# Altium PCB Tag102 Rev21bak080113.PcbDoc
Units mil, origin at the board's own origin, x right, y up, seen from the top; angles counter-clockwise.
Board outline 1902 x 989 mil, 2 copper layers (TopLayer, BottomLayer), stack 64.611 mil thick; 74 components, 42 nets, 215 pads, 84 vias.
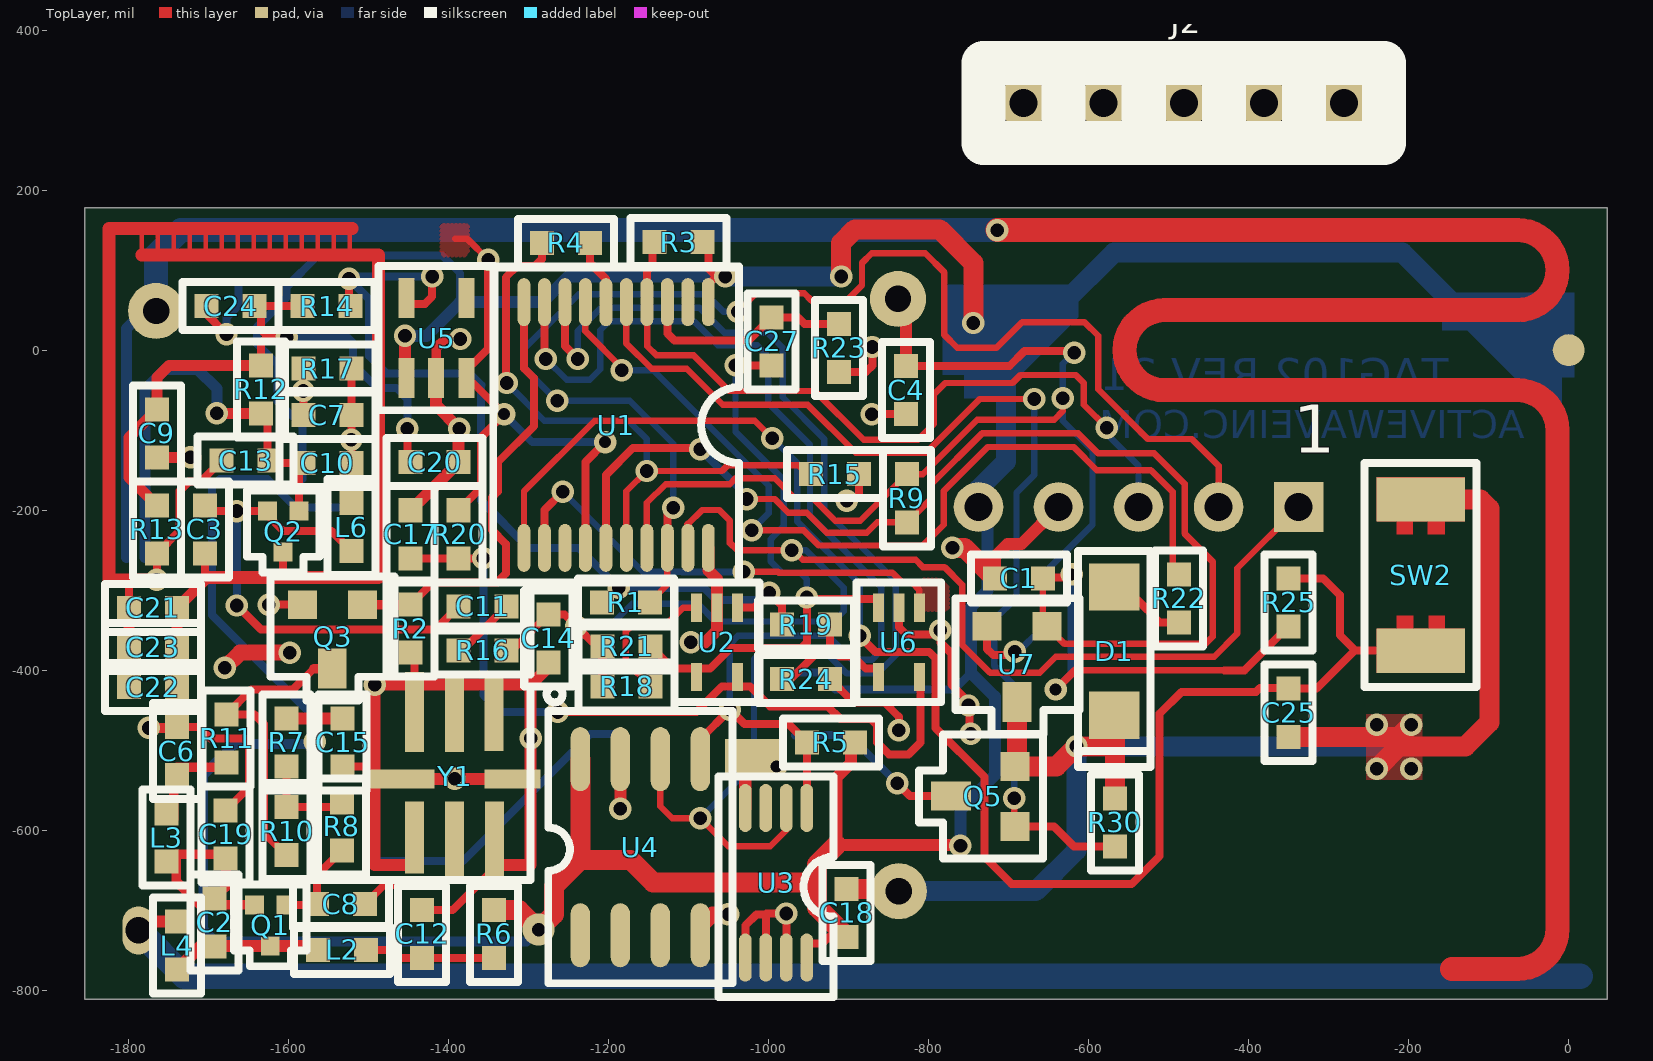
[diagram p0: TopLayer view]
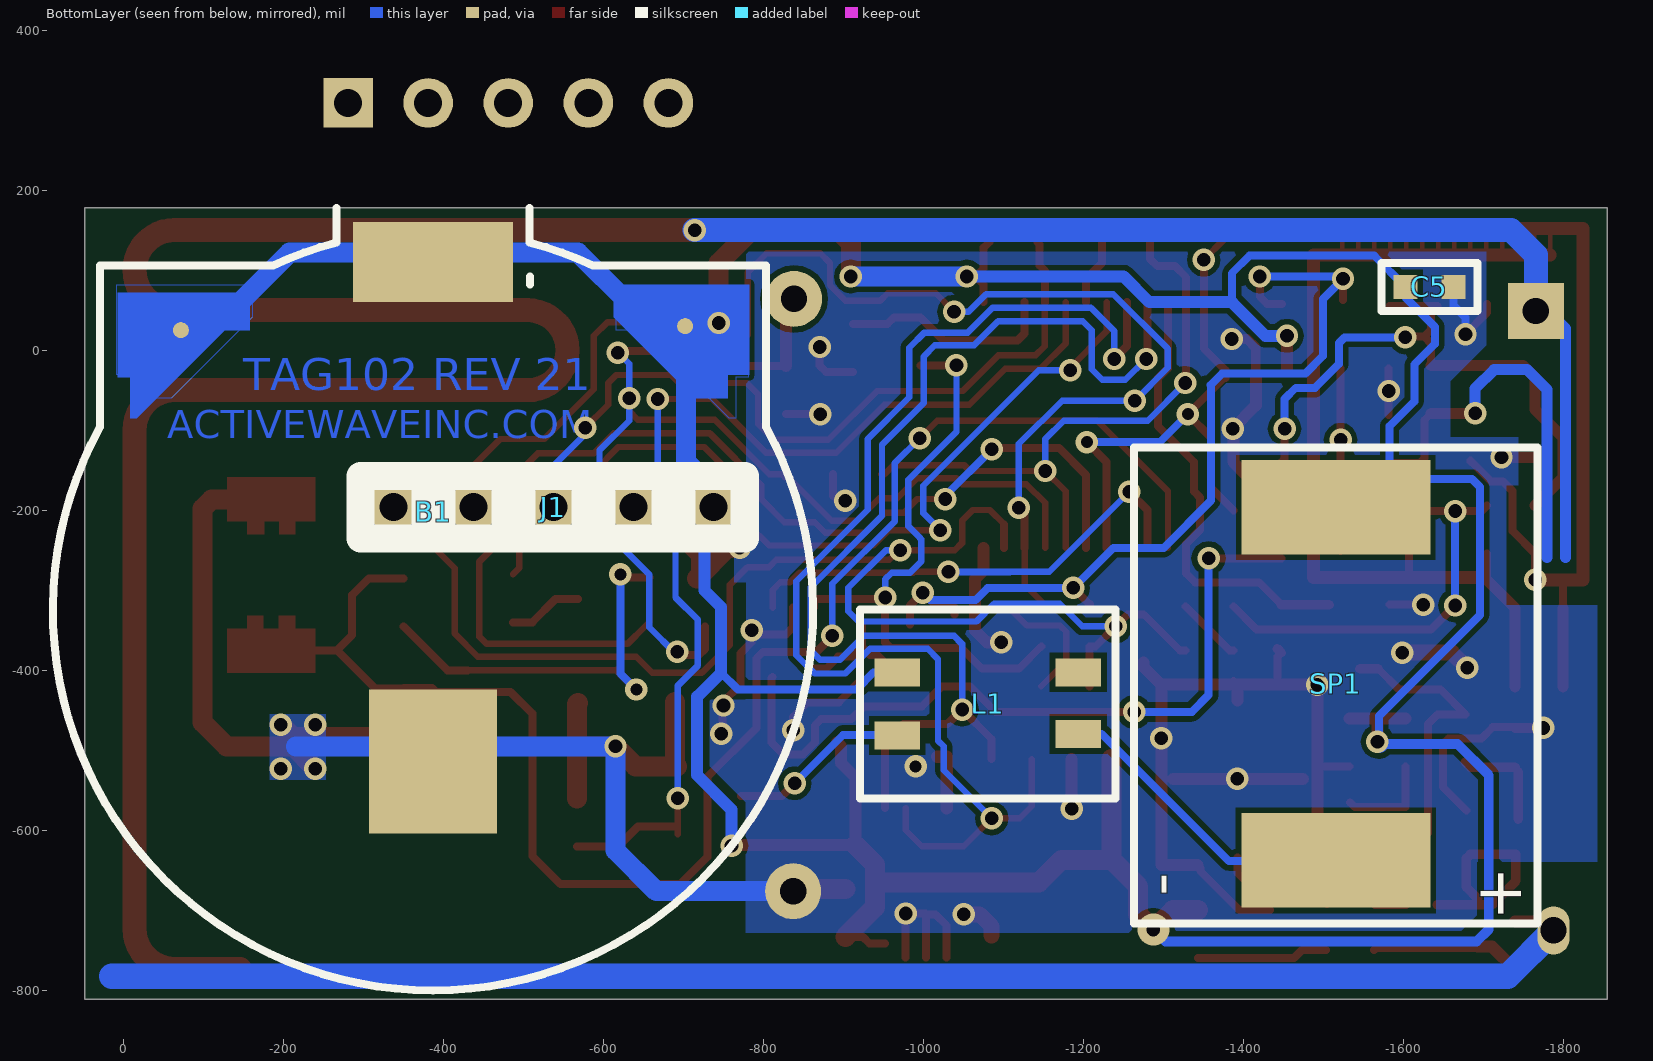
[diagram p1: BottomLayer view, seen from below]

## Layer stack, top to bottom
TopLayer: signal copper 1.4
Dielectric: core 61.811, FR-4, Dk 4.8
BottomLayer: signal copper 1.4

## Board outline
-1854,178 48,178 48,-811 -1854,-811

## Design rules (kind name [scope] priority, off if disabled: settings)
Clearance Clearance_1 [All] p1: gap=7
ComponentClearance [All] p1 off: gap=10 collisioncheckmode=3 verticalgap=10 showdistances=FALSE
HoleSize [All] p1 off: absolutevalues=TRUE maxlimit=100 minlimit=1 maxpercent=80.000 minpercent=20.000
PolygonConnect [All] p1: connectstyle=Direct reliefconductorwidth=20 reliefentries=4 polygonreliefangle="90 Angle"
RoutingVias [All] p1: holewidth=15 width=28 viastyle="Through Hole" minholewidth=15 minwidth=28 maxholewidth=20 maxwidth=40
ShortCircuit ShortCircuit_1 [InNet('NetC13_2') vs InNet('NetC3_1')] p1: allowed=TRUE
ShortCircuit [All] p2: allowed=FALSE
SilkscreenOverComponentPads [All] p1: minsilkscreentomaskgap=10
SolderMaskExpansion [All] p1: expansion=4
TestPointUsage [All] p1: valid=0 allowmultiple=FALSE
Testpoint [All] p1: side=15 testpointundercomponent=TRUE minsize=40 maxsize=100 preferedsize=60 minholesize=20 maxholesize=40 preferedholesize=32 testpointgrid=1 style=1023 order=0-112345678
Width [All] p1: maxlimit=100 minlimit=6 preferedwidth=10
20 further rules are at their usual default settings.

## Components (designator, comment, footprint, x,y, rotation, side; value= is the part's Value field where it differs from the comment)
B1 "BATT HOLDER COIN CR2032 CUT" "BATT HOLDER COIN CR2032 CUT_020812" -387,-325 r180 bottom
C1 "0.1 uF" 0603 -657,-285 r180 top
C2 "2 PF" 0603 -1692,-745 r90 top
C3 "2 pF" 0603 -1704,-254 r90 top
C4 "10pF" 0603 -828,-20 r270 top
C5 ".1uF" 0603 -1602,79 r180 bottom
C6 "100 pF" 0603 -1739,-471 r270 top
C7 "100 pF" 0603 -1521,-81 r180 top
C8 "1000 pF" 0603 -1564,-692 r0 top
C9 "1000 pF" 0603 -1764,-74 r270 top
C10 "1000 pF" 0603 -1581,-141 r0 top
C11 ".1uF" 0603 -1387,-320 r0 top
C12 "33 pF" 0603 -1432.59,-759.41 r90 top
C13 "33 pF" 0603 -1623,-138 r180 top
C14 "100pF" 0603 -1275,-390 r90 top
C15 "0.1 uF" 0603 -1532,-460 r270 top
C17 ".01uF" 0603 -1447,-200 r270 top
C18 "0.1 uF" 0603 -902.13,-733 r90 top
C19 "2.7 pF" 0603 -1678,-635 r90 top
C20 "15pF" 0603 -1387,-140 r180 top
C21 "1.5pF" 0603 -1799,-322 r0 top
C22 "DNS" 0603 -1799,-421 r0 top
C23 "DNS" 0603 -1799,-371 r0 top
C24 "0.1 uF" 0603 -1702,55 r0 top
C25 "22pF" 0603 -350,-423 r270 top
C27 "15pF" 0603 -996,41 r270 top
D1 "LED" "LED STANLEY H_1105W" -568,-376 r90 top
J1 "1X5 HEADER" "1X5 HEADER" -537.5,-196 r180 bottom
J2 "4pin Connector" "1X5 HEADER" -481,309 r180 top (schematic designator J1)
L1 "TRANSFORMER" COIL_6MMX6MM_011012 -1080,-442 r180 bottom
L2 "10nH" 0603 -1502.59,-749.41 r180 top
L3 "0.18uH" 0603 -1752,-579.06 r270 top
L4 "10nH" 0603 -1739,-714 r270 top
L6 "0.33uH" 0603 -1521,-251 r90 top
Q1 "NE85619" "3 PIN ULTRA SUPER MINI MOLD" -1642,-693 r270 top
Q2 "NE85619" "3 PIN ULTRA SUPER MINI MOLD" -1626,-201 r270 top
Q3 "2N7002" "SOT23 FET" -1507,-318 r180 top
Q5 "FDN327N" "SOT23 FET" -692,-595 r90 top
R1 "4.7K" 0603 -1148,-315 r180 top
R2 "1 M" 0603 -1447,-378 r90 top
R3 "39k" 0603 -1142,135 r0 top
R4 "39k" 0603 -1283,134 r0 top
R5 "39k" 0603 -952,-490 r0 top
R6 "22" 0603 -1342.59,-759.41 r90 top
R7 "6.8K" 0603 -1602,-460 r270 top
R8 "4.7 K" 0603 -1533,-625 r90 top
R9 "39K" 0603 -827,-215 r90 top
R10 "39K" 0603 -1602,-571 r270 top
R11 "68" 0603 -1677,-515 r90 top
R12 "10" 0603 -1634,-79 r90 top
R13 "10" 0603 -1764,-194 r270 top
R14 "470" 0603 -1582,55 r0 top
R15 "39K" 0603 -887,-155 r180 top
R16 "3.0K" 0603 -1387,-375 r0 top
R17 "2K" 0603 -1521,-23 r180 top
R18 "1K" 0603 -1207,-420 r0 top
R19 "100K" 0603 -923,-343 r180 top
R20 "2.7K" 0603 -1387,-200 r270 top
R21 "220K" 0603 -1207,-370 r0 top
R22 "200" 0603 -487,-340 r90 top
R23 "300K" 0603 -912,33 r270 top
R24 "100K" 0603 -983,-411 r0 top
R25 "1M" 0603 -350,-345 r90 top
R30 "1M" 0603 -567,-620 r90 top
SP1 "4000 Hz" "SPEAKER 12MMX12MM_011012" -1515,-417 r270 bottom
SW2 "TILT SWITCH" SQ-SEN-DUAL1 -185,-281 r90 top
U1 "PIC16F690" "SSOP20 WIDE" -1075,60 r180 top locked
U2 "MIC861" SC70 -1064,-365 r180 top
U3 "DS1631" "SO8 SMALL" -952,-572 r180 top locked
U4 "24aa256" SO8 -1235,-731 r90 top
U5 "TC1070" SOT23-5A -1452,-35 r90 top
U6 "MAX9119EXK+" SC70 -837,-365 r180 top
U7 "TLE4913" SOT23W -652,-345 r180 top
Y1 "916.5_Resonator" RESONATOR -1392,-536 r0 top

## Footprints (in the part's own frame and the unit in brackets; to place one, negate y for a bottom-side part, rotate by r counter-clockwise, add the part's x,y. Pads: shape width x height; smd on the part's side, far side on the other; paste and mask are expansions set on the pad)
"1X5 HEADER" [mil]
  rect 62x62 hole 35: 1(-200,0)
  round 62 hole 35: 2(-100,0) 3(0,0) 4(100,0) 5(200,0)
  silkscreen extent -241,-39 239,39
"3 PIN ULTRA SUPER MINI MOLD" [mm]
  rect 0.6x0.6 smd: B(0,1) C(1.3,0.5) E(0,0)
  silkscreen extent -0.65,-0.65 1.95,1.65
0603 [mil]
  rect 30x30 smd: 1(0,0) 2(60,0)
  silkscreen extent -30,-30 90,30
"BATT HOLDER COIN CR2032 CUT_020812" [mil]
  rect 160x180 smd: 1(0,-188.88)
  round 20 smd: 2(-315,350) 2(315,355)
  rect 200x100 smd: 2(0,435)
  TopLayer region: 395,407 395,294 368,294 368,265 327,265 226,366 226,407
  TopLayer region: -394,397 -229,397 -229,350 -260,350 -370,240 -378,240 -378,291 -394,291
  silkscreen extent -475,-475 475,502
COIL_6MMX6MM_011012 [mil] "SMT"
  rect 57x35 smd: 1(-113,39.5) 2(-113,-39.5) 3(113,-37.5) 4(113,39.5)
  silkscreen extent -159,-118 159,118
"LED STANLEY H_1105W" [mm]
  rect 1.5x1.6 smd: A(2.032,0) K(-2.032,0)
  silkscreen extent -3.68,-1.15 3.17,1.16
RESONATOR [mm]
  rect 0.6x2.54 smd: 1(1.245,2.159) 2(0,2.134) 3(-1.27,2.134) 6(0,-1.983) 7(1.27,-1.983)
  rect 2.286x0.6 smd: 4(-1.776,0.008)
  rect 0.6x2.286 smd: 5(-1.27,-1.856)
  rect 1.778x0.6 smd: 8(1.831,0.008)
  silkscreen extent 2.92,2.44 3.43,2.95
SC70 [mm]
  rect 0.35x0.9 smd mask+0.051: 1(-0.65,-1.1) 2(0,-1.1) 3(0.65,-1.1) 4(0.65,1.1) 5(-0.65,1.1)
  silkscreen extent -1.35,-1.89 1.35,1.89
SO8 [mil]
  oval 80x24 smd: 1(0,0) 2(0,-50) 3(0,-100) 4(0,-150) 5(220,-150) 6(220,-100) 7(220,-50) 8(220,0)
  silkscreen extent -60,-190 280,40
"SO8 SMALL" [mil]
  oval 16x60 smd mask+2: 1(0,0) 2(25.59,0) 3(51.18,0) 4(76.77,0) 5(76.77,186.85) 6(51.18,186.85) 7(25.59,186.85) 8(0,186.85)
  silkscreen extent -33,-39 110,236
"SOT23 FET" [mil]
  rect 36x50 smd: D(38,80)
  rect 36x36 smd: G(0,0) S(75,0)
  silkscreen extent -40,-35 115,120
SOT23-5A [mil]
  rect 50x20 smd: 1(0,0) 2(0,-37) 3(0,-75) 4(100,-75) 5(100,0)
  silkscreen extent -40,-110 140,35
SOT23W [mil]
  rect 36x36 smd: 1(0,0) 2(74.8,0)
  rect 36x50 smd: 3(37.4,94.49)
  silkscreen extent -41,-35 114,134
"SPEAKER 12MMX12MM_011012" [mm] "SMT"
  rect 3x6 smd: 1(-5.6,0) 2(5.6,0)
  silkscreen extent -7.5,-6.4 7.6,6.4
SQ-SEN-DUAL1 [mm]
  rect 1.4x2.8 smd: 1(-2.4,0) 2(2.4,0)
  TopLayer region: 1.702,1.397 1.702,0.762 1.295,0.762 1.295,0.254 1.702,0.254 1.702,-0.229 1.295,-0.229 1.295,-0.762 1.702,-0.762 1.702,-1.397 3.099,-1.397 3.099,1.397
  TopLayer region: -1.702,-1.397 -1.702,-0.762 -1.295,-0.762 -1.295,-0.254 -1.702,-0.254 -1.702,0.229 -1.295,0.229 -1.295,0.762 -1.702,0.762 -1.702,1.397 -3.099,1.397 -3.099,-1.397
  silkscreen extent -3.56,-1.78 3.56,1.78
"SSOP20 WIDE" [mil]
  oval 16x60 smd mask+2: 1(0,0) 2(25.59,0) 3(51.18,0) 4(76.77,0) 5(102.36,0) 6(127.95,0) 7(153.54,0) 8(179.13,0) 9(204.72,0) 10(230.32,0) 11(230.32,307.09) 12(204.72,307.09) 13(179.13,307.09) 14(153.54,307.09) 15(127.95,307.09) 16(102.36,307.09) 17(76.77,307.09) 18(51.18,307.09) 19(25.59,307.09) 20(0,307.09)
  silkscreen extent -38,-45 269,350

## Part data
B1: library part BATTERY, "Battery"
C1 C2 C3 C4 C5 C6 C7 C8 C9 C10 C12 C13 C15 C18 C19 C20 C21 C23 C24 C25: library part CAP, "Capacitor"
C11 C14 C17 C27: library part C
C22: library part "CAPACITOR VAR"
J1: library part CON5, "Connector"
J2: library part CON5-1, "Connector"
L1: library part INDUCTOR_V2
L2 L3 L4 L6: library part INDUCTOR
Q1 Q2: library part NPN1, "NPN Transistor"
Q3: library part "FET 2"
Q5: "20V N-Channel MOSFET"
R1 R2 R3 R4 R5 R6 R7 R8 R9 R10 R15 R17 R23 R25 R30: library part RESISTOR
R11 R22: library part RES1
R12 R13 R14 R16 R18 R19 R20 R21 R24: library part R
SP1: library part SPEAKER
SW2: library part "SWITCH PB"
U2: library part "OPAMP MIC861"
U4: library part 24AA256
U5: library part TC1070-2
U6: library part "COMPARATOR MAX9117"
U7: library part "HALL EFFECT SWITCH"
Y1: library part RESONATOR

## Free pads (board coordinates)
  rect 74x45 smd: 0(-1017,-508)
  round 40 smd: 0(0,0)
  oval 40x60 hole 33: 1(-1787,-725)
  rect 70x70 smd far side: 1(-1765,49)
  round 70 hole 33: 1(-1765,49) 1(-838,64)
  round 70 hole 33 mask+10: 1(-837,-676)

## Via types
v1: diameter 28, hole 17, TopLayer to BottomLayer, tented both sides, 67 vias
v2: diameter 28, hole 17, TopLayer to BottomLayer, 10 vias
v3: diameter 28, hole 15, TopLayer to BottomLayer, tented both sides, 5 vias
v4: diameter 28, hole 17, TopLayer to BottomLayer, tented bottom, 1 vias
v5: diameter 40, hole 17, TopLayer to BottomLayer, tented both sides, 1 vias

## Nets (pads, with @x,y where several pads share a name; then routed paths per layer and width w, separated by ;. In a path a pad name is that pad's centre, name@x,y a point inside that pad or via, vN(x,y) a via of type N, cw(c..) or ccw(c..) an arc to the next point about the centre after c; other vN are vias at no path point)
3V: B1.2 C5.1 C15.1 C18.1 J1.5 L1.1 R3.2 R5.2 R6.2 R7.1 SP1.1 U1.1 U3.8 U4.8 U5.1 | length 5550.4
  TopLayer w10: R3.2 -1075,128 -1075,102 v1@-1065,92 ; U1.1 -1075,82 v1@-1065,92 ; v1(-1054,92) v1@-1065,92 ; U3.8@-952,-741 -932.13,-741 -924.13,-733 C18.1
  TopLayer w15: R7.1 -1567,-460 ; v1(-1567,-489) -1567,-460 ; C15.1 -1567,-460 ; U5.1@-1454,-24 v1(-1454,18) ; R5.2 -897,-495 -897,-516 -915,-534 -915,-618.41 -760.59,-618.41 v1(-760,-619)
  TopLayer w25: R6.2 -1311.59,-699.41 v5(-1287,-724) -1268.11,-705.11 -1268.11,-669.93 -1235,-636.82 ; U4.8 -1235,-636.82 ; -915,-618.41 -939,-642.41 -939,-665 ; v1(-909,92) -909,134 -892,151 -786,151 -744,109 v1(-744,34) ; C18.1 -939,-696.13 -939,-665 ; -1235,-636.82 -1172.18,-636.82 -1144,-665 -939,-665
  BottomLayer w10: SP1.1@-1582,-161 -1582,-95 -1613,-64 -1613,-18 -1639,8 -1639,29 -1602,66 C5.1 -1563,118 -1407,118 -1385,96 -1385,60 ; v1@-1569,-491 -1569,-457 -1695,-331 -1695,-171 -1685,-161 -1626,-161 -1590.47,-196.53 SP1.1 ; L1.1 -937.5,-402.5 -916,-424 -768,-424 -747,-403
  BottomLayer w12.28: v1@-1569,-491 -1570,-492 -1667,-492 -1706,-531 -1706,-724 -1691,-739 -1302,-739 v5(-1287,-724)
  BottomLayer w15: v1(-1454,18) -1427,18 -1385,60 -1282,60 -1250,92 v1(-1054,92) ; v1(-760,-619) -760,-574 -717,-531 -717,-433 -747,-403 -747,-321 -726,-300 -726,-207.5 J1.5
  BottomLayer w25: v1@-1569,-491 v1(-1567,-489) ; v1(-1054,92) v1(-909,92) ; J1.5@-737.5,-173.5 -703,-139 -703,-9 ; -633,57 -568,122 -387,122 -208,122 -143,57
+1.2V: R1.2 R14.2 R19.2 U2.1 U5.5 | length 1139.6
  TopLayer w10: R14.2@-1524,63 v1(-1524,89) ; U5.5@-1448,58 -1429,58 -1420,67 v4(-1420,92) ; R1.2@-1208,-317 -1207,-317 v1(-1187,-297) ; U2.1@-1038.41,-330.31 U2.1 -1017.69,-321.69 v2(-999,-303) -983,-319 R19.2
  BottomLayer w10: v1(-1524,89) -1499,64 -1499,-7 -1477,-29 -1373,-29 -1358.67,-43.33 ; v1@-1524,92 v4(-1420,92) ; -1359,-43.66 -1359,-188 -1300,-247 -1237,-247 v1(-1187,-297) -1080,-297 -1065,-312 -1008,-312 v2(-999,-303)
ANT: L4.1 pad.1@-1787,-725 | length 1860.2
  TopLayer w15: pad.1@-1776,-714 L4.1
  BottomLayer w32: pad.1@-1786,-726 -1730,-782 14,-782
ENABLE_RCVR: R20.1 U1.14 U5.3 | length 703
  TopLayer w8: -1391,139 -1376,139 v1(-1350,113)
  TopLayer w10: R20.1 -1359,-172 -1359,-109 v3(-1330,-80) -1375,-35 U5.3 -1377,-25 -1350,2 v1(-1350,113) ; U1.14 -1228.54,-139.54 v3(-1204,-115)
  BottomLayer w10: v3(-1330,-80) -1295,-115 v3(-1204,-115)
GND: B1.1 C1.2 C4.2 C5.2 C6.1 C7.2 C9.2 C12.2 C14.1 C15.2 C17.1 C18.2 C19.2 C20.1 C24.1 C25.2 D1.K J1.4 pad.0@-1017,-508 pad.1@-837,-676 Q3.S Q5.S R2.1 R15.1 R17.2 R23.2 R24.2 R30.2 SW2.2 U1.20 U2.2 U3.4 U3.5 U3.6 U3.7 U4.4 U4.7 U5.2 U6.2 U7.3 Y1.1 Y1.2 Y1.3 Y1.4 Y1.5 Y1.7 Y1.8 | length 5119.6
  TopLayer w10: C6.1 -1711,-471 -1697,-485 -1656,-485 -1649,-492 -1649,-546 C19.2 ; C24.1@-1704,58 -1704,55 -1704,47 v1(-1677,20) ; v1(-1624,-318) Q3.S ; C7.2 v1(-1581,-51) R17.2 ; C15.2 -1494,-520 -1492,-518 ; R2.1 -1442.13,-382.87 Y1.3@-1442.13,-418 ; C12.2 -1394.41,-699.41 -1346,-651 -1346,-647 Y1.7@-1342,-643 ; Y1.2@-1392,-418 Y1.2@-1387.13,-413.13 ; U3.5 -1028.77,-718.77 -1015,-705 -1003.74,-705 -1003.18,-704.44 ; U3.6 -1003.18,-704.44 ; U3.7 v1(-977.59,-703.85) -1002.59,-703.85 -1003.18,-704.44 ; R24.2 -894,-440 -855,-440 -837,-458 v1(-837,-475) ; R23.2 -878,-27 -870,-19 v1(-870,4) ; v1(-902,-188) -893,-188 -887,-182 R15.1 ; v1(-871,-80) C4.2 ; pad.1@-840,-673 pad.1@-837,-676 ; U6.2 -837,-346 -828,-355 v1@-785,-355 ; v1(-785,-350) v1@-785,-355 ; v1@-749,-471 -749,-440 -771,-418 -771,-379 -785,-365 v1@-785,-355
  TopLayer w12: v1(-1774,-472) C6.1@-1739,-472 ; R2.1 R2.1@-1442,-373
  TopLayer w12.28: U5.2 -1415,3 -1404,14 v1(-1385,14)
  TopLayer w14: C9.2 v1(-1722,-134)
  TopLayer w15: Y1.4@-1473.93,-535.68 Y1.4 v1(-1392,-535.68) Y1.8 Y1.8@-1311.76,-535.68 ; C17.1 C20.1 -1387,-99 v1(-1386,-98) -1415,-69 U5.2 ; Y1.5@-1442,-643 -1492,-643 -1492,-535.68 -1492,-518 v1(-1492,-418) -1442.13,-418 -1442,-418 Y1.2@-1392,-418 ; Y1.2@-1392,-438 Y1.2@-1392,-418 ; Y1.7@-1342,-643 -1297,-643 -1297,-535.68 v1(-1297,-485) -1297,-418 ; C14.1 -1275,-396 -1297,-418 ; v1(-1185,-573) U4.7 ; v1(-1097,-365) -1079,-365 -1064,-350 U2.2 -1064,-286 -1075,-275 U1.20 ; C1.2 -717,-258 -701,-242 -683.5,-242 J1.4 ; Y1.2@-1392,-418 -1343,-418 -1297,-418
  TopLayer w16: U3.4 -1028.77,-508 pad.0@-1017,-508
  TopLayer w20: v1(-1679,-397) -1660,-378 v1(-1598,-378) ; U4.4 -1085,-720 -1070,-705 v1(-1050,-705)
  TopLayer w25: C18.2 pad.1@-840,-673 ; v1(-770,-247) -755,-247 C1.2 ; U7.3 -689.4,-517.4 Q5.S -640,-520 v1(-615,-495) -567,-495 ; D1.K@-568,-440.96 -567,-441.96 -567,-495 ; R30.2 -567,-495 ; C25.2 -212,-483 v2(-197,-468) ; v2(-240,-523) -212,-495 -129,-495 -99,-465 -99,-198 -110.49,-186.51 SW2.2
  BottomLayer w10: v1@-1675,22 v1(-1677,20) -1677,41 -1662,56 C5.2
  BottomLayer w25: pad.1@-837,-676 -666,-676 -615,-625 v1(-615,-495) -387,-495 -216,-495
  other v1: -747,-479 -750,-444
  other v2: -197,-523 -240,-468
  other v3: -990,-520
I2CSCL: U1.8 U3.2 U4.6 | length 1548.7
  TopLayer w8: U4.6 -1135,-570 -1120,-585 v1(-1085,-585) -1050,-620 -997.59,-620 -977.59,-600 U3.2
  TopLayer w10: U1.8 -1254.13,5.13 v1(-1238,-11)
  BottomLayer w8: v1(-1238,-11) -1238,24 -1209,53 -1086,53 -1055,22 -1001,22 -982,3 -982,-59 -930,-111 -930,-199.54 -841,-288.54 -841,-381 -864,-404 -902,-404 -933,-373 -1005,-373 -1018,-386 -1018,-488 -1025,-495 -1025,-525 v1(-1085,-585)
I2CSDA: R5.1 U1.9 U3.1 U4.5 | length 1425.9
  TopLayer w10: v1@-1279.72,-9.28 U1.9 ; U4.5 -1085,-486 v1(-1048,-449) -1030,-467 -975,-467 R5.1 U3.1
  BottomLayer w8: v1(-1278,-11) -1252,-37 -1223,-37 -1210,-24 -1210,25 -1199,36 -1093,36 -1063,6 -1014,6 -1000,-8 -1000,-66 -948,-118 -948,-207 -859,-296 -859,-375 -871,-387 -895,-387 -925,-357 -1038,-357 -1048,-367 v1(-1048,-449)
  BottomLayer w10: v1(-1278,-11) v1@-1277.54,-11
"LED OUT": R22.2 U1.7 | length 1150.6
  TopLayer w8: U1.7 -1228.54,23.54 -1183,-22 v2(-1183,-25) ; v1(-1021,-225) -956.01,-225 -937.01,-244 -807,-244 -781,-218 -781,-176 -726,-121 -618.63,-121 -589.63,-150 -522,-150 -495,-177 -495,-272 R22.2
  BottomLayer w8: v2(-1183,-25) -1144,-25 -999.5,-169.5 -999.5,-203.5 v1(-1021,-225)
NetC2_1: C2.1 L2.2 L4.2 Q1.C | length 190.6
  TopLayer w10: L2.2@-1567.82,-744.18 L2.2
  TopLayer w15: L4.2 -1710,-745 C2.1 ; C2.1@-1692,-744.18 Q1.C L2.2@-1567.82,-744.18
NetC2_2: C2.2 C19.1 L3.2 Q1.E | length 263.3
  TopLayer w12: C2.2 -1678,-671 C19.1 -1683,-630 -1740,-630 -1740,-639.06 -1740,-663 -1710,-693 -1692,-693 Q1.E
NetC3_1: C3.1 C21.2 C22.2 C23.2 Q2.C | length 310.9
  TopLayer w10: C3.1 -1704,-281 -1701,-284 ; Q2.C -1606.32,-283.69 -1606,-284
  TopLayer w14: C22.2 C23.2 C21.2 -1701,-284
  TopLayer w16: -1701,-284 -1606,-284
NetC3_2: C3.2 C11.1 L6.1 Q2.E | length 629
  TopLayer w10: C3.2 -1697,-201 v1(-1664,-201) Q2.E -1626,-206 -1606,-226 -1555,-226 -1546,-226 L6.1 ; v1(-1664,-319) -1634,-349 -1416,-349 C11.1
  BottomLayer w10: v1(-1664,-319) v1(-1664,-201)
NetC6_2: C6.2 L3.1 R11.1 | length 123.5
  TopLayer w12: L3.1@-1743,-586 -1743,-579.06 -1743,-531 C6.2@-1743,-527 ; C6.2@-1739,-521 -1683,-521 R11.1
NetC7_1: C7.1 C10.2 L6.2 R17.1 | length 168
  TopLayer w10: L6.2 C10.2 v1(-1521,-112) C7.1 R17.1
NetC8_1: C8.1 Q1.B R8.1 | length 119.5
  TopLayer w10: Q1.B -1564,-693 C8.1 -1564,-656 R8.1
NetC8_2: C8.2 Y1.6 | length 147.1
  TopLayer w10: C8.2 -1480,-668 -1407,-668 -1392,-653 Y1.6@-1392,-634.06
NetC9_1: C9.1 C20.2 C24.2 R12.2 R13.1 R14.1 | length 772.6
  TopLayer w10: R12.2 -1634,8.51 -1625.48,17.03 ; v1(-1601.86,16) -1602.89,17.03 -1625.48,17.03 ; R14.1 C24.2 -1634,48 -1634,25.55 -1625.48,17.03 ; v1(-1451,-98) -1451,-136 C20.2
  TopLayer w14: R13.1 -1799,-159 -1799,-109 C9.1 -1764,-34 -1749,-19 R12.2
  BottomLayer w10: v1(-1601.86,16) -1526,16 -1519,9 -1519,-17 -1489,-47 -1465,-47 -1451,-61 v1(-1451,-98)
NetC10_1: C10.1 C13.1 Q2.B R12.1 | length 575.4
  TopLayer w10: R12.1 -1626,-87 -1626,-135 C13.1 -1620,-141 C10.1 -1586.63,-146.63 Q2.B
  TopLayer w14: v1(-1689,-79) R12.1
  BottomLayer w14: -1779,-259 -1779,-49 -1754,-24 -1713,-24 -1689,-48 v1(-1689,-79)
NetC11_2: C11.2 R16.1 | length 82.8
  TopLayer w10: R16.1 -1382,-375 C11.2
NetC12_1: C12.1 L2.1 R6.1 | length 164.1
  TopLayer w10: L2.1 -1472.59,-749.41 -1462.59,-759.41 C12.1 R6.1
NetC13_2: C13.2 C21.1 C22.1 C23.1 R13.2 | length 2426.7
  TopLayer w6: -1783,119 -1783,152 ; -1763,119 -1763,152 ; -1743,119 -1743,152 ; -1723,119 -1723,152 ; -1703,119 -1703,152 ; -1683,119 -1683,152 ; -1663,119 -1663,152 ; -1643,119 -1643,152 ; -1623,119 -1623,152 ; -1603,119 -1603,152 ; -1583,119 -1583,152 ; -1563,119 -1563,152 ; -1543,119 -1543,152 ; -1523,119 -1523,152
  TopLayer w10: -1799,-339 C21.1 -1799,-287 ; v1(-1764,-287) R13.2 -1735.72,-225.72 -1735.72,-175.88 -1723.91,-164.07 -1709.07,-164.07 C13.2 C13.2@-1683,-139 ; -1606.32,-283.69 -1606,-284
  TopLayer w14: C22.1 C23.1 C21.1
  TopLayer w16: -1783,119 -1763,119 -1743,119 -1723,119 -1703,119 -1683,119 -1663,119 -1643,119 -1623,119 -1603,119 -1583,119 -1563,119 -1543,119 -1523,119 -1487,119 -1487,-284 -1606,-284 ; v1(-1764,-287) -1799,-287 -1824,-287 -1824,152 -1783,152 -1763,152 -1743,152 -1723,152 -1703,152 -1683,152 -1663,152 -1643,152 -1623,152 -1603,152 -1583,152 -1563,152 -1543,152 -1523,152 -1520,152
NetC17_2: C17.2 R20.2 U2.5 U6.5 | length 966
  TopLayer w10: C17.2 R20.2 v1(-1356,-260) ; v1(-1263,-452) -1090,-452 -1058,-420 -1038.41,-420 -1023,-420 -998,-445 -926,-445 -910,-461 -872,-461 -864,-469 -864,-490 -849,-505 -825,-505 -810,-490 -810,-409.72 U6.5
  BottomLayer w10: v1(-1356,-260) -1356,-431 -1335,-452 v1(-1263,-452)
NetC27_1: C27.1 R23.1 U1.3 | length 272.2
  TopLayer w10: U1.3 -1126.18,21 -1117.18,12 -1025,12 C27.1 -963,41 -955,33 R23.1
NetD1_A: D1.A R22.1 | length 93
  TopLayer w10: D1.A@-568,-311.04 -540,-311.04 -511.04,-340 R22.1
NetL1_2: L1.2 Q5.D | length 227.1
  TopLayer w10: v1(-839,-541) -823,-557 Q5.D
  BottomLayer w10: L1.2 -966,-480.5 -899.5,-480.5 v1(-839,-541)
NetL1_3: L1.3 SP1.2 | length 375.8
  BottomLayer w10: SP1.2@-1503,-638.47 -1381.47,-638.47 -1222.5,-479.5 L1.3
NetQ3_D: Q3.D R10.2 R11.2 | length 383.2
  TopLayer w10: R10.2 -1630,-603 -1630,-467 -1642,-455 R11.2 -1646,-424 -1594,-424 -1568,-398
  TopLayer w12: -1568,-398 Q3.D
NetR7_2: R7.2 R8.2 R10.1 | length 122.5
  TopLayer w10: R7.2 R10.1 -1539,-571 R8.2
NetR18_2: R18.2 U2.3 | length 182.4
  TopLayer w8: R18.2 -1178,-389 -1178,-352 -1170,-344 -1129,-344 -1106.69,-321.69 U2.3
  TopLayer w10: U2.3@-1090,-322.1 U2.3
NetR19_1: R19.1 R24.1 U6.4 | length 177.8
  TopLayer w10: R24.1 -972,-411 -942,-381 -933,-381 -923,-371 ; R19.1@-923,-341 -923,-371 ; U6.4@-863,-398 -878.28,-398 -893.28,-383 -911,-383 -923,-371
"PROG CLK": J1.2 R1.1 U1.18 | length 1691.2
  TopLayer w8: R1.1 -1126.18,-293.18 U1.18 ; v1(-1038,48) -1015,71 -955,71 -946,62 -902,62 -883,81 -883,109 -871,121 -804,121 -780,97 -780,19 -764,3 -715,3 -683,35 -605,35 -588,18 -588,-49 -526,-111 -471,-111 -437.5,-144.5 J1.2
  TopLayer w10: U1.18 -1126.18,-204.18 v1(-1119,-197)
  BottomLayer w8: v1(-1119,-197) -1119,-193 -1119,-117 -1173,-63 v1(-1264,-63) -1305,-22 -1305,2 -1237,70 -1078,70 -1056,48 v1(-1038,48)
"PROG DATA": C14.2 J1.1 R16.2 R18.1 R21.1 U1.19 | length 1756.8
  TopLayer w8: U1.19@-1100.59,-217.59 -1082.66,-199.66 -1061.34,-199.66 -1048,-213 -1048,-241 -1039,-250 v2(-971,-250) -969,-250 -957,-262 -816,-262 -807,-271 -780,-271 -758,-293 -758,-368 -723,-403 -661,-403 -641,-383 -443,-383 -414,-354 -414,-272.5 J1.1
  TopLayer w10: R16.2 -1320,-375 C14.2 -1255,-330 v2(-1239.89,-345.11) -1215,-370 R21.1 R18.1 ; U1.19 U1.19@-1100.59,-217.59
  BottomLayer w8: v2(-1239.89,-345.11) -1198.11,-345.11 -1170,-317 -1088,-317 -1066,-339 -919,-339 -906,-326 -906,-297 -953,-250 v2(-971,-250)
"PROG MCLR": J1.3 R3.1 U1.4 | length 970.6
  TopLayer w8: U1.4@-1151.35,59.58 -1151.35,4.98 -1139.84,-6.53 -1093.47,-6.53 -1049,-51 -942,-51 -881,-112 -813,-112 -793,-92 -793,-55 -779,-41 -695,-41 -685,-31 -616,-31 -606,-41 -606,-68 v1(-577,-97)
  TopLayer w10: U1.4@-1151.77,59.58 U1.4 -1151.77,99.23 -1145,106 -1145,132 R3.1
  BottomLayer w8: v1(-577,-97) -577,-104.95 -537.5,-144.45 J1.3
RSSI: C27.2 R21.2 U2.4 U6.3 | length 769.2
  TopLayer w10: R21.2 -1119,-398 -1089.59,-398 -1073,-398 -1047,-372 -959,-372 -952,-365 -952,-317 -946,-311 -863,-311 -863,-321.28 U6.3 ; v2(-1041,-19) C27.2
  BottomLayer w8: v2(-1041,-19) -1041,-102 -981,-162 -981,-220 -996,-235 -996,-235.36 -997,-236.36 -997,-264 -983,-278 -960,-278 -952,-286 v2(-952,-309)
"RX DATA": U1.12 U6.1 | length 598
  TopLayer w8: v1(-1031,-277) -988,-277 -987,-278 -845,-278 -833,-290 -821,-290 -811.41,-299.59 U6.1
  TopLayer w10: U1.12 -1279.72,-199.72 v1(-1257,-177)
  BottomLayer w8: v1(-1257,-177) -1157,-277 -1108,-277
  BottomLayer w9: -1108,-277 v1(-1031,-277)
"SPEAKER OUT": Q5.G R30.1 U1.5 | length 1355.7
  TopLayer w8: U1.5 -1177.36,8.36 -1145.8,-23.2 -1101.8,-23.2 -1057,-68 -951,-68 -891,-128 -803,-128 -736,-61 v1(-668,-61) ; Q5.G@-693,-605 v1(-693,-560)
  TopLayer w10: Q5.G -643,-595 -618,-620 R30.1
  BottomLayer w8: v1(-693,-560) -693,-419 -718,-394 -718,-337 -690,-309 -690,-178 -668,-156 v1(-668,-61)
"TAMPER PWR": C1.1 R9.1 R25.1 U1.15 U7.1 | length 1963.7
  TopLayer w8: v1(-1027,-186) -992,-186 -975,-203 -952,-203 -927,-228 -877,-228 -864,-215 R9.1 -826,-215 -797,-186 -797,-168 -733,-104 -613,-104 -588,-129 -518,-129 -480,-167 -480,-229 -445,-264 -445,-358 -454,-367 -630,-367 U7.1 -657,-340 C1.1 ; -617,-400 -430,-400
  TopLayer w10: U1.15 -1202.95,-155.95 -1169,-122 -1087,-122 v1(-1085,-124) ; C1.1@-657.23,-284 -657,-284 -625,-284 v3(-621,-280) ; v3(-641,-424) -617,-400 ; -430,-400 -405,-400 R25.1
  BottomLayer w10: v1(-1085,-124) -1027,-182 v1(-1027,-186) ; v3(-641,-424) -621,-404 v3(-621,-280)
"TAMPER SIG": C4.1 pad.1@-838,64 R9.2 U1.17 U7.2 | length 1496.1
  TopLayer w8: U1.17 -1151.77,-190.77 -1128.31,-167.31 -1048.31,-167.31 -1041,-160 -992,-160 -967,-185 -944.54,-185 -916.54,-213 -885,-213 R9.2 -807,-155 -739,-87 -643,-87 -632,-76 v1(-632,-60)
  TopLayer w10: C4.1 -699,-20 -680,-1 v1@-620,-1 ; R9.2@-827,-158 R9.2 ; U7.2 -726.8,-373.2 -719,-381 -692,-381 v1@-690,-379
  TopLayer w15: pad.1@-838,64 -828,54 C4.1
  BottomLayer w8: v1@-690,-379 -657.23,-346.23 -657.23,-280.23 -595,-218 -595,-125 -632,-88 v1(-632,-60) -632,-17 v1(-618,-3)
  other v1: -692,-377
"TILT SENSOR": C25.1 R25.2 SW2.1 U1.11 | length 2033.7
  TopLayer w8: U1.11 -1305.32,-176.31 -1217,-88 -1017,-88 v1(-995,-110)
  TopLayer w10: v1(-886,-357) -866,-377 -799,-377 -791,-385 -791,-472 -730,-533 -730,-633 -696,-667 -546,-667 -511,-632 -511,-454 -484,-427 -391,-427 -386,-422 -351,-422 C25.1 -315,-423 -267,-375 ; R25.2 -307,-285 -286,-306 -286,-356 -267,-375 ; SW2.1 -185.49,-375 -267,-375
  BottomLayer w8: v1(-995,-110) -964,-141 -964,-214 -886,-292 v1(-886,-357)
"TX DATA": Q3.G R2.2 U1.10 | length 568.2
  TopLayer w10: R2.2 -1419,-290 -1367,-290 -1339,-290 -1328,-279 -1328,-242 -1345.42,-224.58 -1345.42,-183.88 -1338,-176.46 -1338,-140 -1293,-95 -1293,-35 -1305.32,-22.69 U1.10
  TopLayer w12: Q3.G R2.2
VMP: R4.2 U1.6 | length 82.3
  TopLayer w10: R4.2 -1223,109 -1202.95,88.95 U1.6
VMS: R4.1 R15.2 U1.16 | length 768.6
  TopLayer w8: U1.16 -1177.36,-176.36 v1(-1152,-151) -1058,-151 -1051,-144 -962,-144 -951,-155 R15.2
  TopLayer w10: v1@-1328,-40 -1328,91 -1314,105 -1292,105 -1283,114 R4.1
  BottomLayer w8: v1(-1327,-41) -1280,-88 -1175,-88 -1152,-111 v1(-1152,-151)
pads on no net: J2.1 J2.2 J2.3 J2.4 J2.5 L1.4 U1.2 U1.13 U3.3 U4.1 U4.2 U4.3 U5.4
copper on no net: | length 4174.2
  TopLayer w30: v1(-714,150) -64,150 cw(c-64,100) -14,100 cw(c-64,100) -64,50 -505,50 ccw(c-505,0) -555,0 ccw(c-505,0) -505,-50 -64,-50 cw(c-64,-100) -14,-100 -14,-723 cw(c-64,-723) -64,-773 -146,-773
  BottomLayer w14: -1802,-259 -1802,27 -1780,49 -1765,49
  BottomLayer w30: -1765,49 -1765,119 -1734,150 v1(-714,150)

## Polygon pours and split planes (outlines as drawn)
GND on TopLayer "GND_TOP" (solid, remove dead copper): -253,-455 -253,-537 -183,-537 -183,-455
ENABLE_RCVR on TopLayer "TopLayer-ENABLE_RCVR" (hatched 90Degree grid 5 track 8, remove dead copper, pour order 1000): -1407,155 -1407,120 -1377,120 -1377,155
"RX DATA" on TopLayer "TopLayer-ENABLE_RCVR" (hatched 90Degree grid 5 track 8, remove dead copper, pour order 1000): -807,-288 -807,-323 -777,-323 -777,-288
GND on BottomLayer "GND_BOT" (solid, remove dead copper): -253,-455 -253,-537 -183,-537 -183,-455
GND on BottomLayer "BottomLayer-GND 3" (solid, remove dead copper, pour order 1005): -1853.13,-318.88 -1728.13,-318.88 -1728.13,-168.88 -1743.13,-168.88 -1743.13,-108.88 -1658.13,-108.88 -1658.13,-38.88 -1703.13,6.12 -1703.1,123.12 -778.1,123.12 -778.19,-234.13 -763.19,-234.13 -763.19,-290.13 -778.19,-290.13 -778,-437 -733,-437 -733,-520 -778,-565 -778,-728 -1669,-728 -1691,-706 -1691,-639 -1853.13,-638.88
3V on BottomLayer "BottomLayer-3V" (hatched 90Degree grid 5 track 8, remove dead copper, pour order 1000): -19,-60 -19,-31 8,-31 8,82 -161,82 -161,41 -60,-60
3V on BottomLayer "BottomLayer-3V 1" (hatched 90Degree grid 5 track 8, remove dead copper, pour order 1001): -616,25 -616,72 -781,72 -781,-34 -765,-34 -765,-85 -757,-85 -647,25
no net on BottomSolder (hatched 90Degree grid 5 track 8, remove dead copper): -19,-60 -19,-31 8,-31 8,82 -161,82 -161,41 -60,-60
no net on BottomSolder (hatched 90Degree grid 5 track 8, remove dead copper): -616,25 -616,72 -781,72 -781,-34 -765,-34 -765,-85 -757,-85 -647,25

## Other copper
TopLayer:
  text ".Layer_Name" at 694,-2372 h80
BottomLayer:
  text "TAG102 REV 21" at -150,-50 h40
  text "ACTIVEWAVEINC.COM" at -55,-110 h35
  text ".Layer_Name" at 1049,-2372 h80

## Silkscreen, mask and mechanical layers (free items; w line width, h text height)
TopOverlay:
  lines w10: -1474,-662 -1297,-662 -1297,-420 ; -1343.7,103.31 -1065.36,103.31 -1036.61,103.31 -1036.61,56.06
  text "1" at -344,-128 h60
  text ".Layer_Name" at 694,-2372 h80
BottomOverlay:
  rectangle: -415,-235 -360,-157
  rectangle: -515,-235 -460,-157
  rectangle: -615,-240 -560,-157
  rectangle: -715,-240 -660,-157
  lines w10: -508,92 -508,82 ; -508,82 -508,82
  text ".Layer_Name" at -1053,-945 h80
TopPaste:
  text ".Layer_Name" at 694,-2372 h80
BottomPaste:
  region: -773,72 -617,72 -617,25 -649,25 -695,-21 -755,-82 -765,-82 -765,-31 -781,-30 -780,72
  region: -149,77 3,77 2,-27 -23,-27 -23,-53 -57,-53 -155,43 -155,77
  text ".Layer_Name" at 1049,-2372 h80
TopSolder:
  rectangle: -1408,120 -1376,156
  rectangle: -1789,126 -1516,144
  rectangle: -806,-324 -774,-288
  text ".Layer_Name" at 694,-2372 h80
BottomSolder:
  text ".Layer_Name" at 1049,-2372 h80
Assemblytop:
  text "ASSEMBLY" at 434,-2369 h60.04
Outline:
  the board outline again, w10
  text "TAG 102 REV.20" at 419,-2377 h60
Title:
  lines w10: -1965.08,-2396.18 -1965.08,-1296.18 cw(c-1865.08,-1296.18) -1865.08,-1196.18 2334.92,-1196.18 cw(c2334.92,-1296.18) 2434.92,-1296.18 2434.92,-2396.18 cw(c2334.92,-2396.18) 2334.92,-2496.18 -1865.08,-2496.18 ; -1965.08,-2395.18 ccw(c-1864.08,-2395.18) -1865.84,-2496.16 ; -1865.95,-2446.17 cw(c-1865.08,-2396.18) -1915.08,-2396.18 -1915.08,-2296.18 cw(c-1865.08,-2296.18) -1865.08,-2246.18 -190.08,-2246.18 cw(c-190.08,-2296.18) -140.08,-2296.18 -140.08,-2396.18 ; -1865.95,-2196.17 cw(c-1865.08,-2146.18) -1915.08,-2146.18 -1915.08,-1921.18 cw(c-1865.08,-1921.18) -1865.08,-1871.18 -1115.08,-1871.18 ; -1865.08,-2446.18 -190.08,-2446.18 ; -1865.08,-2196.18 -1115.08,-2196.18 ; -1115.79,-1871.21 cw(c-1114.08,-1920.18) -1065.08,-1920.18 ; -1115.08,-1821.18 -1865.08,-1821.18 cw(c-1865.08,-1771.18) -1915.08,-1771.18 -1915.08,-1546.18 cw(c-1865.08,-1546.18) -1865.08,-1496.18 -1115.08,-1496.18 ; -1114.08,-2196.18 ccw(c-1114.08,-2147.18) -1065.08,-2147.18 ; -1114.08,-1496.18 cw(c-1114.08,-1545.18) -1065.08,-1545.18 ; -1113.08,-1821.18 ccw(c-1113.08,-1773.18) -1065.08,-1773.18 ; -1065.08,-2146.18 -1065.08,-1921.18 ; -1065.08,-1771.18 -1065.08,-1546.18 ; -1015.08,-2147.18 ccw(c-966.08,-2147.18) -966.08,-2196.18 ; -1015.08,-2146.18 -1015.08,-2021.18 cw(c-965.08,-2021.18) -965.08,-1971.18 634.92,-1971.18 ; -1015.08,-1872.18 ccw(c-966.08,-1872.18) -966.08,-1921.18 ; -1015.08,-1871.18 -1015.08,-1546.18 cw(c-965.08,-1546.18) -965.08,-1496.18 1084.92,-1496.18 cw(c1084.92,-1546.18) 1134.92,-1546.18 1134.92,-1871.18 ; -965.08,-2196.18 634.92,-2196.18 ; -965.08,-1921.18 1084.92,-1921.18 ; -188.92,-2446.18 ccw(c-188.08,-2398.18) -140.1,-2396.5 ; -40.95,-2446.17 cw(c-40.08,-2396.18) -90.08,-2396.18 -90.08,-2296.18 cw(c-40.08,-2296.18) -40.08,-2246.18 1634.92,-2246.18 cw(c1634.92,-2296.18) 1684.92,-2296.18 1684.92,-2396.18 ; -40.08,-2446.18 1634.92,-2446.18 ; 635.92,-2196.18 ccw(c635.92,-2147.18) 684.91,-2146.32 ; 635.92,-1971.18 cw(c635.92,-2020.18) 684.92,-2020.18 ; 684.92,-2146.18 684.92,-2021.18 ; 734.92,-2146.18 734.92,-2021.18 ; 734.92,-2145.18 ccw(c785.92,-2145.18) 785.03,-2196.17 ; 734.99,-2021.69 cw(c782.92,-2019.18) 782.92,-1971.18 ; 784.92,-2196.18 1084.92,-2196.18 ccw(c1084.92,-2146.18) 1134.92,-2146.18 1134.92,-2021.18 ; 784.92,-1971.18 1084.92,-1971.18 ; 1085.79,-1921.18 ccw(c1084.92,-1871.18) 1134.93,-1871.18 ; 1085.92,-1971.18 cw(c1085.92,-2020.18) 1134.92,-2020.18 ; 1184.92,-2147.18 ccw(c1233.92,-2147.18) 1234.78,-2196.17 ; 1184.92,-2146.18 1184.92,-2021.18 cw(c1234.92,-2021.18) 1234.92,-1971.18 2334.92,-1971.18 ; 1234.92,-2196.18 2334.92,-2196.18 ccw(c2334.92,-2146.18) 2384.92,-2146.18 2384.92,-2020.18 ccw(c2335.92,-2020.18) 2335.92,-1971.18 ; 1636.08,-2446.18 ccw(c1636.92,-2398.18) 1684.9,-2396.5 ; 1734.92,-2397.18 ccw(c1783.92,-2397.18) 1784.78,-2446.17 ; 1734.92,-2396.18 1734.92,-2296.18 cw(c1784.92,-2296.18) 1784.92,-2246.18 2334.92,-2246.18 ; 1784.92,-2446.18 2334.92,-2446.18 ccw(c2334.92,-2396.18) 2384.92,-2396.18 2384.92,-2296.18 ; 2334.21,-1246.21 cw(c2335.92,-1295.18) 2384.92,-1295.18 ; 2334.92,-2246.17 cw(c2334.92,-2296.18) 2384.92,-2295.3 ; 2334.92,-1246.18 1234.92,-1246.18 ccw(c1234.92,-1296.18) 1184.92,-1296.18 1184.92,-1871.18 ccw(c1234.92,-1871.18) 1234.92,-1921.18 2334.92,-1921.18 ccw(c2334.92,-1871.18) 2384.92,-1871.18 2384.92,-1296.18 ; -1915.08,-1396.18 ccw(c-1865.08,-1396.18) -1865.08,-1446.18 1084.92,-1446.18 ccw(c1084.92,-1396.18) 1134.92,-1396.18 1134.92,-1296.18 ccw(c1084.92,-1296.18) 1084.92,-1246.18 -1865.08,-1246.18 ccw(c-1865.08,-1296.18) -1915.08,-1296.18 -1915.08,-1396.18
  text "Active Wave" at -835.08,-1391.18 h96
  text "Active Wave" at 1276.52,-1425.9 h100
  text "902 Clint Moore Rd." at 1226.52,-1530.9 h64
  text "TITLE:" at -977.58,-1583.68 h53.33
  text "ENGINEER:" at -1865.08,-1596.18 h53.33
  text "Suite 118" at 1521.52,-1635.9 h64
  text "Boca Raton FL." at 1386.52,-1730.9 h64
  text "Tag102" at -197,-1754 h96
  text "PHONE:" at -1865.08,-1783.68 h53.33
  text "561-999-9422" at 1441.52,-1850.9 h64
  text "Drawn by:" at -1865.08,-1976.18 h53.33
  text "J.N" at -1482.11,-1977.23 h53.33
  text "PART NO.:" at -965.08,-2058.68 h53.33
  text "REV:" at 772.42,-2058.68 h53.33
  text "DATE:" at 1234.92,-2058.68 h53.33
  text ".Print_Date" at 1649.69,-2111.64 h53.33
  text "21" at 947.42,-2133.68 h53.33
  text "PHONE:" at -1865.08,-2158.68 h53.33
  text "FILE NAME:" at -1865.08,-2336.18 h53.33
  text "LAYER:" at -25.08,-2336.18 h53.33
  text "GERBER:" at 1794.92,-2336.18 h53.33
  text ".Pcb_File_Name_No_Path" at -1406,-2393 h53.33
Notes:
  lines w25: -1929.4,2978.5 -1419.4,2978.5
  text "NOTES" at -1909.4,3023.5 h100
  text "1) BOARD MEASURES .989 X  1.902 IN" at -1909.4,2823.5 h100
  text "2) MATERIAL IS .031 THICK FR4" at -1909.4,2623.5 h100
  text "3) 2 LAYER BOARD" at -1909.4,2423.5 h100
  text "4) COPPER WEIGHT IS 1 OUNCE" at -1909.4,2223.5 h100
  text "5) FINISH IS SMOBC" at -1909.4,2023.5 h100
  text "6) RECTANGULAR BOARD WITH NO CUTOUTS" at -1909.4,1823.5 h100
  text "7) ROUTE TO BOARD OUTLINE" at -1909.4,1623.5 h100
  text "8) ADD SILKSCREEN" at -1909.4,1423.5 h100
  text "9) NO SILKSCREEN ON PADS" at -1909.4,1223.5 h100
  text "10) GREEN SOLDER MASK BOTH SIDES" at -1909.4,1023.5 h100
  text "11) HASL ON ALL PADS AND VIAS" at -1909.4,823.5 h100
  text "12) .122 MIL TOOLING HOLE SHALL BE +3-0 MILS TOL." at -1908.4,624.5 h100
Mechanical12:
  circle w10: c-837.68,-676 r35
  circle w10: c-1765.68,49 r35
  circle w10: c-1787.68,-725 r35
  circle w10: c-838.68,64 r35
  circle w10: c-837,-676 r35
  circle w10: c-1765,49 r35
  circle w10: c-1787,-725 r35
  circle w10: c-838,64 r35
  circle w10: c-838,64 r35
  circle w10: c-1787,-725 r35
  circle w10: c-1765,49 r35
  circle w10: c-837,-676 r35
  lines w10: -1812.68,-725 -1762.68,-725 ; -1790.68,49 -1740.68,49 ; -1787.68,-750 -1787.68,-700 ; -1765.68,24 -1765.68,74 ; -1702.68,-398 -1652.68,-398 ; -1677.68,-423 -1677.68,-373 ; -1546.68,-112 -1496.68,-112 ; -1521.68,-137 -1521.68,-87 ; -1421.68,138 -1371.68,138 ; -1396.68,113 -1396.68,163 ; -1352.68,-41 -1302.68,-41 ; -1333.68,-156 -1283.68,-156 ; -1327.68,-66 -1327.68,-16 ; -1308.68,-181 -1308.68,-131 ; -1305.16,-742.16 -1269.8,-706.8 ; -1305.16,-706.8 -1269.8,-742.16 ; -1214.16,-81.16 -1178.8,-45.8 ; -1214.16,-45.8 -1178.8,-81.16 ; -1181.68,-195 -1131.68,-195 ; -1156.68,-220 -1156.68,-170 ; -1093.16,-77.16 -1057.8,-41.8 ; -1093.16,-41.8 -1057.8,-77.16 ; -1049.16,-268.16 -1013.8,-232.8 ; -1049.16,-232.8 -1013.8,-268.16 ; -969.14,-261.17 -933.79,-225.81 ; -969.14,-225.81 -933.79,-261.17 ; -863.68,64 -813.68,64 ; -862.68,-676 -812.68,-676 ; -838.68,39 -838.68,89 ; -837.68,-701 -837.68,-651 ; -1854,-781 ccw(c-1824,-781) -1824,-811 ; -1854,-781 ccw(c-1824,-781) -1824,-811 ; -1854,-781 -1854,148 ; -1854,-781 -1854,148 ; -1854,-781 -1854,148 ; -1854,148 cw(c-1824,148) -1824,178 ; -1824,-811 -806,-811 ; -1824,-811 -806,-811 ; -1824,-811 -806,-811 ; -1824,178 -806,178 ; -1824,178 -806,178 ; -1824,178 -806,178 ; -865,-786 -815,-786 ; -865,-786 -865,-736 ; -865,-786 -865,-736 ; -865,-786 -815,-786 ; -865,-736 -815,-736 ; -865,-736 -815,-736 ; -815,-786 -815,-736 ; -815,-786 -815,-736 ; -806,-811 ccw(c-806,-781) -776,-781 ; -806,-811 ccw(c-806,-781) -776,-781 ; -806,178 cw(c-806,148) -776,148 ; -806,178 cw(c-806,148) -776,148 ; -776,-781 -776,148 ; -776,-781 -776,148 ; -1854.68,-781 ccw(c-1824.68,-781) -1824.68,-811 -806.68,-811 ccw(c-806.68,-781) -776.68,-781 -776.68,148 ccw(c-806.68,148) -806.68,178 -1824.68,178 ccw(c-1824.68,148) -1854.68,148 -1854.68,-781
  text "NEW" at -1238,-23 h30
  text "NEW" at -1114,-23 h30
  text "NEW" at -1072,-214 h30
  text "NEW" at -915,-262 h30
  text "NEW" at -1326,-684 h30
  text "3V" at -852,-769 h15
  text "3V" at -852,-769 h15
DrillDrawing:
  text ".Legend" at 342,-815 h60

## Dimensions
-1854,178 to 48,178 on Dimension
-1854,-811 to -1854,178 on Dimension

## Text inside footprints (layer, text, board x,y; h text height)
SP1: BottomOverlay "-" at -1278.78,-653.22 h59.06 r90; BottomOverlay "+" at -1696.1,-645.35 h59.06 r90; AssemblyBottom "-" at -1369.33,-515.43 h59.06 r90; AssemblyBottom "+" at -1609.49,-519.36 h59.06 r90